# Altium PCB QUTMS-IMD-V00-PCB.PcbDoc
Units mil, origin at the board's own origin, x right, y up, seen from the top; angles counter-clockwise.
Board outline 6000 x 4000 mil, 2 copper layers (Top Layer, Bottom Layer); 65 components, 43 nets, 202 pads, 0 vias.
Unrouted connection lines stored in the file: 113.
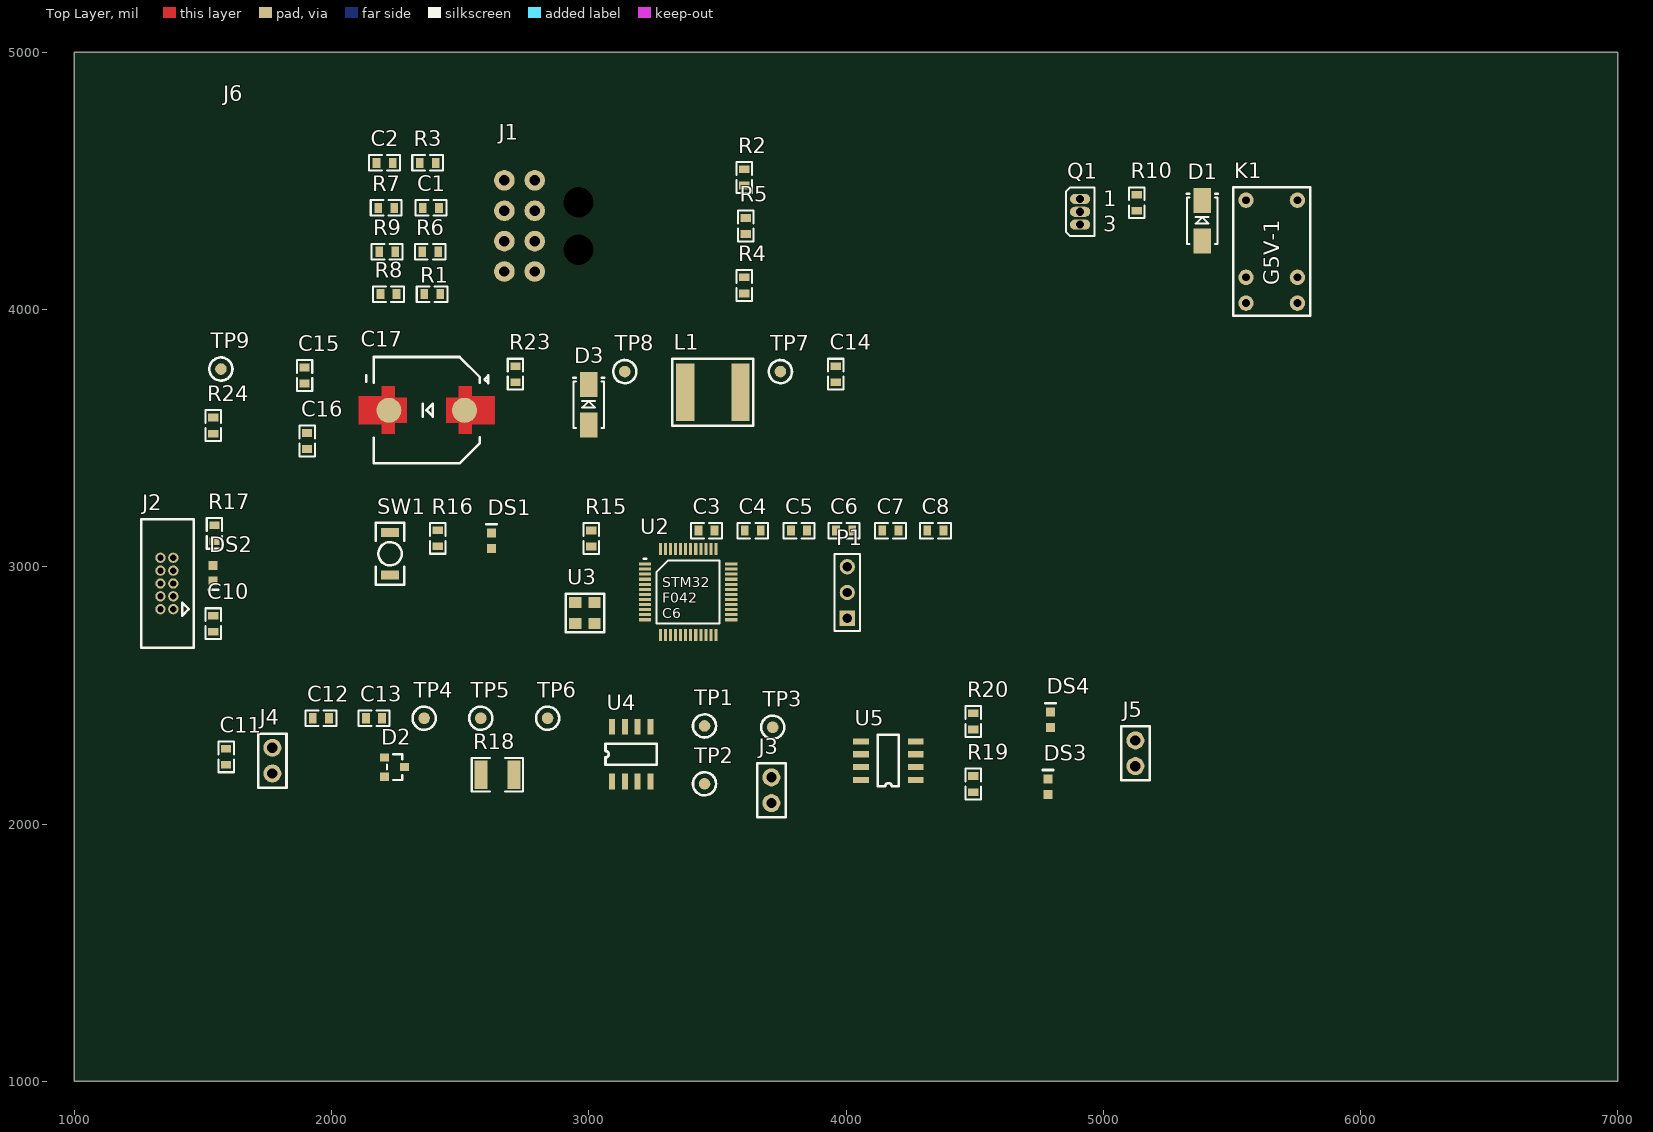
[diagram p0: Top Layer view]
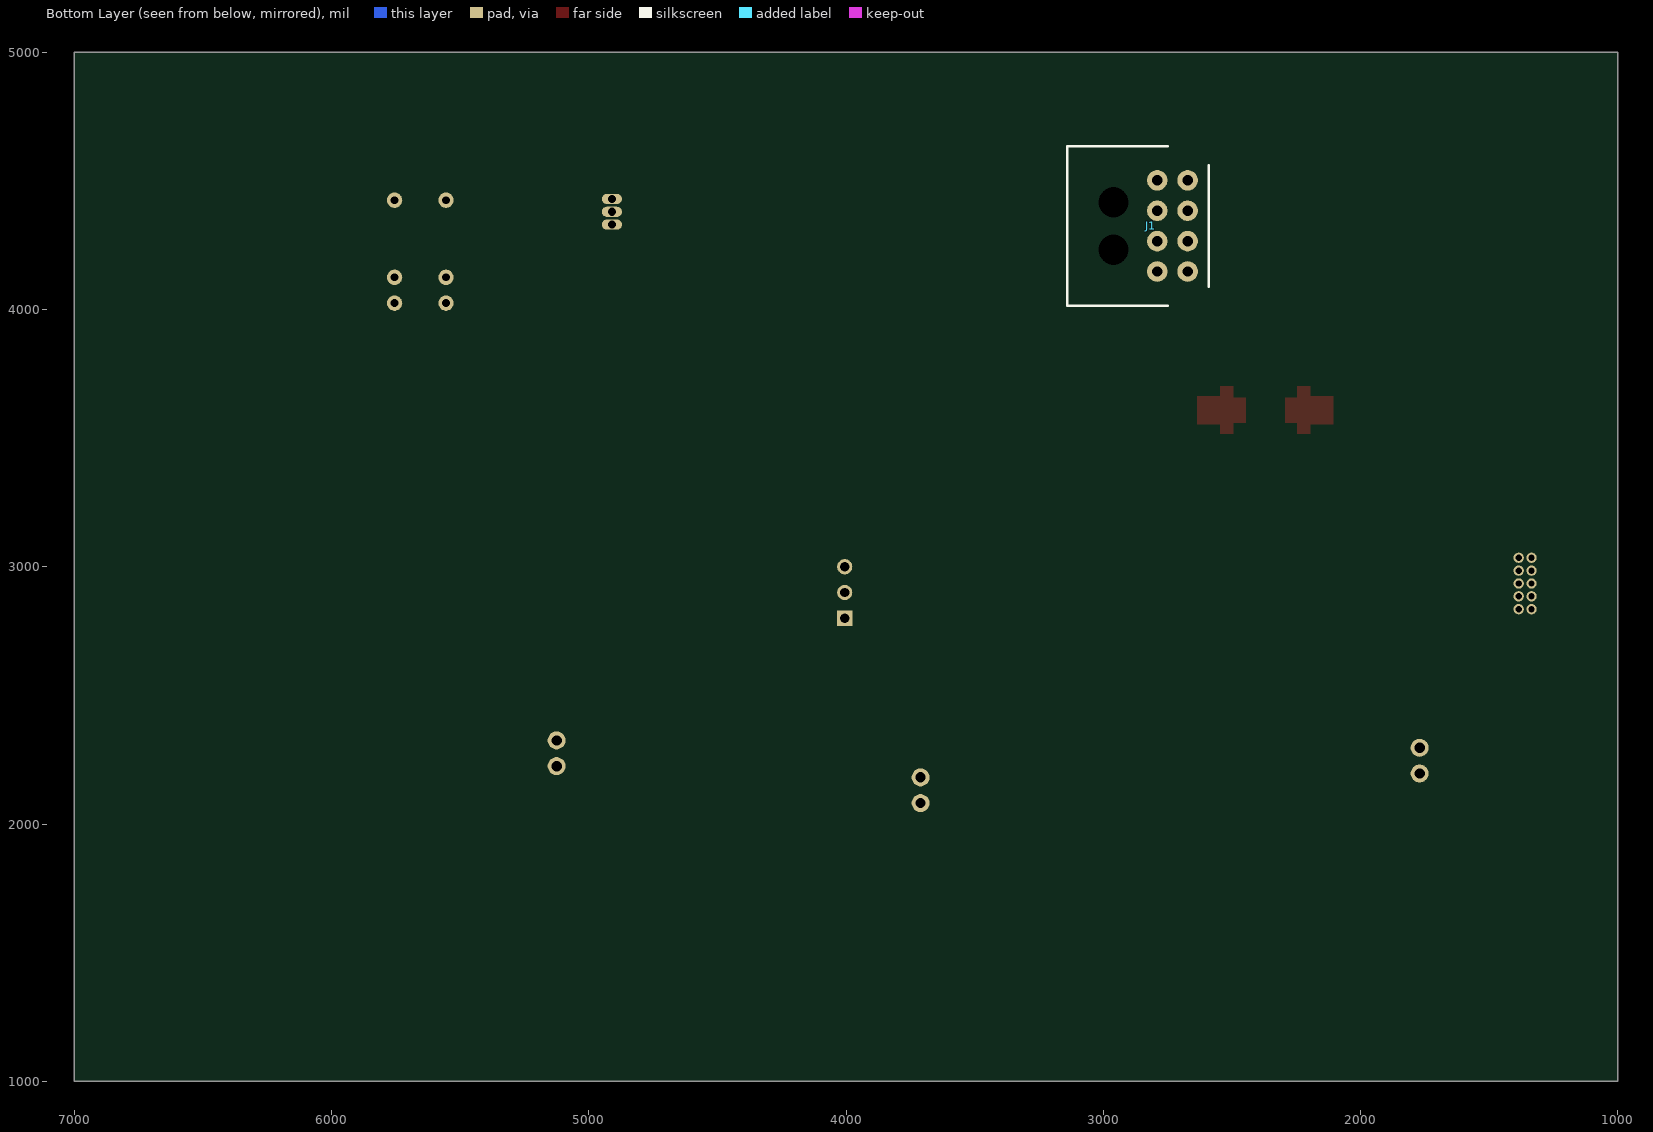
[diagram p1: Bottom Layer view, seen from below]

## Layer stack, top to bottom
Top Solder: solder mask 0.4, Solder Resist, Dk 3.5
Top Layer: signal copper 1.4
Dielectric 1: dielectric 12.6, FR-4, Dk 4.8
Bottom Layer: signal copper 1.4
Bottom Solder: solder mask 0.4, Solder Resist, Dk 3.5

## Board outline
1000,1000 7000,1000 7000,5000 1000,5000

## Design rules (kind name [scope] priority, off if disabled: settings)
Clearance [All] p1: gap=10 ignorepadtopadclearanceinfootprint=FALSE except(0: Arc-Hole Track-Hole SMDPad-Hole THPad-Hole Via-Hole Fill-Hole Poly-Hole Region-Hole Text-Hole)
PolygonConnect [All] p1: connectstyle=Relief reliefconductorwidth=10 reliefentries=4 polygonreliefangle="90 Angle" airgapwidth=10
RoomDefinition MICROCONTROLLER [InComponentClass('MICROCONTROLLER')] p1: confinementstyle=ConfineIn formatcopy=TRUE lockcomponents=FALSE outline 1222.52,2660.59 4862.52,2660.59 4862.52,3280.59 1222.52,3280.59
RoomDefinition "POWER SUPPLY" [InComponentClass('POWER SUPPLY')] p2: confinementstyle=ConfineIn formatcopy=TRUE lockcomponents=FALSE outline 1190,3368.74 4105,3368.74 4105,3918.74 1190,3918.74
RoomDefinition CANBUS [InComponentClass('CANBUS')] p3: confinementstyle=ConfineIn formatcopy=TRUE lockcomponents=FALSE outline 1490,2041.24 5310,2041.24 5310,2491.24 1490,2491.24
RoomDefinition SHUTDOWN [InComponentClass('SHUTDOWN')] p4: confinementstyle=ConfineIn formatcopy=TRUE lockcomponents=FALSE outline 4845,3965 5815,3965 5815,4585 4845,4585
RoomDefinition SHDN-IMD-S01-V00-IMDDaughter [InComponentClass('SHDN-IMD-S01-V00-IMDDaughter')] p5: confinementstyle=ConfineIn formatcopy=TRUE lockcomponents=FALSE outline 1905,4820 2040,4820 2040,4915 1905,4915
RoomDefinition IMD [InComponentClass('IMD')] p6: confinementstyle=ConfineIn formatcopy=TRUE lockcomponents=FALSE outline 1317.47,3990 4257.47,3990 4257.47,4660 1317.47,4660
RoutingVias [All] p1: holewidth=28 width=50 viastyle="Through Hole" minholewidth=28 minwidth=50 maxholewidth=28 maxwidth=50
SolderMaskExpansion [All] p1: expansion=4 istentingtop=FALSE
Width [All] p1: maxlimit=10 minlimit=10 preferedwidth=10
30 further rules are at their usual default settings.

## Classes and differential pairs
component class SHUTDOWN: D1 K1 Q1 R10
component class SHDN-IMD-S01-V00-IMDDaughter: J6
component class "POWER SUPPLY": C14 C15 C16 C17 D3 L1 R23 R24 TP7 TP8 TP9 U7
component class MICROCONTROLLER: C3 C4 C5 C6 C7 C8 C9 C10 DS1 DS2 J2 P1 R15 R16 R17 SW1 U2 U3
component class IMD: C1 C2 J1 R1 R2 R3 R4 R5 R6 R7 R8 R9
component class CANBUS: C11 C12 C13 D2 DS3 DS4 J3 J4 J5 R18 R19 R20 TP1 TP2 TP3 TP4 TP5 TP6 U4 U5

## Components (designator, comment, footprint, x,y, rotation, side; value= is the part's Value field where it differs from the comment)
C1 "100nF" Cap_Ceramic_0603 2386.24,4395 r0 top
C2 "100nF" Cap_Ceramic_0603 2206.24,4570 r0 top
C3 "100nF" Cap_Ceramic_0603 3457.52,3140.59 r0 top
C4 "4u7" Cap_Ceramic_0603 3637.52,3140.59 r0 top
C5 "100nF" Cap_Ceramic_0603 3817.52,3140.59 r0 top
C6 "4u7" Cap_Ceramic_0603 3992.52,3140.59 r0 top
C7 "100nF" Cap_Ceramic_0603 4172.52,3140.59 r0 top
C8 "4u7" Cap_Ceramic_0603 4347.52,3140.59 r0 top
C10 "100nF" Cap_Ceramic_0603 1540,2778.76 r90 top
C11 "100nF" Cap_Ceramic_0603 1590,2261.24 r90 top
C12 "100nF" Cap_Ceramic_0603 1958.76,2411.24 r0 top
C13 "100nF" Cap_Ceramic_0603 2165,2411.24 r180 top
C14 "100nF 100V 5% X7R 0603" Cap_Ceramic_0603 3960,3748.74 r90 top
C15 "47uF 16V 1210" Cap_Ceramic_0603 1895,3743.74 r90 top
C16 "47uF 16V 1210" Cap_Ceramic_0603 1905,3488.74 r90 top
C17 "47uF 80V 10% AluPoly 10x10mm" CAP_ALU_10x10mm 2370,3608.74 r0 top
D1 "1N4448WQ-7-F" SMA 5385,4345 r90 top
D2 "NUP2105L" NUP2105L 2245,2221.24 r270 top
D3 "B260A-13-F" SMA 3000,3630 r90 top
DS1 "LED Orange" "LED ORANGE 0603" 2622.52,3100.59 r90 top
DS2 "LED Orange" "LED ORANGE 0603" 1540,2975 r270 top
DS3 "LED Blue 0603" "LED BLUE 0603" 4785,2145 r90 top
DS4 "LED Blue 0603" "LED BLUE 0603" 4795,2405 r90 top
J1 "Microfit 3.0 2x4" Microfit_2X4_R_TH 2960,4325 r270 bottom
J2 "IDC 10P 2x5 1.27mm" "IDC 1.27MM 10P" 1360,2935 r90 top
J3 "Jumper 2Way Pins" Jumper_2Way_Pin 3710,2081.24 r270 top
J4 "Jumper 2Way Pins" Jumper_2Way_Pin 1770,2296.24 r90 top
J5 "Jumper 2Way Pins" Jumper_2Way_Pin 5125,2225 r270 top
J6 "Microfit 3.0 2x3" Microfit_2X3_R_SMD 1920,4805 r90 top
K1 "G5V-1-DC12" G5V-1 5655,4225 r90 top
L1 "74404064221" Inductor_6x6mm 3480,3678.74 r0 top
P1 "UART" HDR1X3 4005,2800 r90 top
Q1 "2N7002KT1G" E3 4910,4380 r0 top
R1 "2k2" Res_ThinFilm_0603 2391.24,4060 r0 top
R2 "2k2" Res_ThinFilm_0603 3605,4513.76 r90 top
R3 "2k2" Res_ThinFilm_0603 2373.76,4570 r0 top
R4 "10k" Res_ThinFilm_0603 3605,4093.76 r90 top
R5 "3k9" Res_ThinFilm_0603 3610,4325 r90 top
R6 "10k" Res_ThinFilm_0603 2383.76,4225 r0 top
R7 "3k9" Res_ThinFilm_0603 2212.47,4395 r0 top
R8 "10k" Res_ThinFilm_0603 2221.24,4060 r0 top
R9 "3k9" Res_ThinFilm_0603 2216.24,4225 r0 top
R10 "1K" Res_ThinFilm_0603 5130,4415 r90 top
R15 "4k7" Res_ThinFilm_0603 3010,3110 r90 top
R16 "330R" Res_ThinFilm_0603 2412.52,3110.59 r90 top
R17 "330R" Res_ThinFilm_0603 1545,3130 r90 top
R18 "120R 1% 1210" Res_ThinFilm_1210 2645,2191.24 r180 top
R19 "330R" Res_ThinFilm_0603 4495,2155 r90 top
R20 "330R" Res_ThinFilm_0603 4495,2398.76 r90 top
R23 "64k9 1%" Res_ThinFilm_0603 2715,3748.74 r90 top
R24 "19k6 1%" Res_ThinFilm_0603 1540,3548.74 r90 top
SW1 "B3U-1000P" "BTN B3U-1000P" 2227.52,3050.59 r90 top
TP1 "TestPoint_SMD" TestPointSMD 3450,2381.24 r0 top
TP2 "TestPoint_SMD" TestPointSMD 3450,2156.24 r0 top
TP3 "TestPoint_SMD" TestPointSMD 3715,2376.24 r0 top
TP4 "TestPoint_SMD" TestPointSMD 2360,2411.24 r0 top
TP5 "TestPoint_SMD" TestPointSMD 2580,2411.24 r0 top
TP6 "TestPoint_SMD" TestPointSMD 2840,2411.24 r0 top
TP7 "TestPoint_SMD" TestPointSMD 3745,3758.74 r0 top
TP8 "TestPoint_SMD" TestPointSMD 3140,3758.74 r0 top
TP9 "TestPoint_SMD" TestPointSMD 1570,3768.74 r0 top
U2 "STM32F042C6" STM32F042C6 3219.09,3010.59 r0 top
U3 "DSC1001DI1-008.0000T" DSC1001DI1-008.0000TCT-ND 2985,2820 r0 top
U4 "SN65HVD233" SN65HVD233DR 3165,2271.24 r90 top
U5 "Si8621BC-B-IS" Si8621BC-B-IS 4165,2246.24 r180 top

## Footprints (in the part's own frame and the unit in brackets; to place one, negate y for a bottom-side part, rotate by r counter-clockwise, add the part's x,y. Pads: shape width x height; smd on the part's side, far side on the other; paste and mask are expansions set on the pad)
"BTN B3U-1000P" [mil] "OMRON B3U-1000P"
  rect 35x70 smd: 1(-82.68,0) 2(82.68,0)
  silkscreen extent -120,-55 120,55, body extent -79,-49 79,49, height 63
CAP_ALU_10x10mm [mil]
  round 97.08 smd paste+0 mask+0: A(147.18,-0.5) K(-147.11,-0.5)
  Top Layer region: 76.8,-49.22 76.8,49.21 124.05,49.21 124.05,92.52 175.23,92.52 175.23,55 265,55 265,-55 175.23,-55 175.23,-92.52 124.05,-92.52 124.05,-49.22
  Top Layer region: -76.74,-49.22 -76.74,49.21 -123.98,49.21 -123.98,92.52 -175.16,92.52 -175.16,55 -265,55 -265,-55 -175.16,-55 -175.16,-92.52 -123.98,-92.52 -123.98,-49.22
  silkscreen extent -235,-207 240,207, body extent -260,-217 260,217, height 10
Cap_Ceramic_0603 [mil]
  rect 30x40 smd: 1(-31.24,0) 2(31.24,0)
  silkscreen extent -60,-30 60,30, body extent -31,-16 32,16, height 33
DSC1001DI1-008.0000TCT-ND [mil]
  rect 48x43 smd: 1(-37.4,41.34) 2(37.4,41.34) 3(37.4,-41.34) 4(-37.4,-41.34)
  silkscreen extent -75,-75 75,75, body extent -49,-63 49,63, height 33
E3 [mm] "TO, Flat Index; 3 In-Line, Axial Leads; Body Dia. 4.6mm; Lead Dia. 0.5 mm (max)"
  oval 2x1 hole 0.8: 1(0,1.27) 2(0,0) 3(0,-1.27)
  silkscreen extent -1.41,-2.41 1.41,2.41
G5V-1 [mil]
  round 60 hole 30: 1(-200,100) 2(-100,100) 5(200,100) 6(200,-100) 9(-100,-100) 10(-200,-100)
  silkscreen extent -250,-150 250,150, body extent -242,-148 250,148, height 394
HDR1X3 [mm] "Connector; Header; 3 Position"
  rect 1.5x1.5 hole 0.9: 1(0,0)
  round 1.5 hole 0.9: 2(2.54,0) 3(5.08,0)
  silkscreen extent -1.27,-1.27 6.35,1.27
"IDC 1.27MM 10P" [mil]
  round 40 hole 25: 1(-100,-25) 2(-100,25) 3(-50,-25) 4(-50,25) 5(0,-25) 6(0,25) 7(50,-25) 8(50,25) 9(100,-25) 10(100,25)
  silkscreen extent -250,-105 250,100, body extent -249,-104 249,100, height 214
Inductor_6x6mm [mm]
  rect 1.8x5.7 smd: 1(-2.667,0) 2(2.794,0)
  silkscreen extent -3.94,-3.3 4.06,3.3, body extent -3,-3 3,3, height 4.56
Jumper_2Way_Pin [mil]
  round 70 hole 40: 1(-100,0) 2(0,0)
  silkscreen extent -155,-55 55,55, body extent -142,-48 42,47, height 332
"LED BLUE 0603" [mil]
  rect 35x35 smd: 1(-30,0) 2(30,0)
  silkscreen extent 65,-20 65,20, body extent -40,-20 40,20, height 30
"LED ORANGE 0603" [mil]
  rect 35x35 smd: 1(-30,0) 2(30,0)
  silkscreen extent 65,-20 65,20, body extent -40,-20 40,20, height 30
Microfit_2X3_R_SMD [mil]
Microfit_2X4_R_TH [mil]
  round 80 hole 40: 1(177.17,170) 2(59.06,170) 3(-59.06,170) 4(-177.17,170) 5(177.17,288.19) 6(59.06,288.19) 7(-59.06,288.19) 8(-177.17,288.19)
  round 0 hole 118.11 mask+10: NC(-92.52,0) NC(92.52,0)
  silkscreen extent -310,-180 310,370, body extent -318,-180 318,302, height 350
NUP2105L [mm]
  rect 0.8x0.9 smd: 1(-0.95,-1) 2(0.95,-1) 3(0,1)
  silkscreen extent -1.27,-0.76 1.27,0.76, body extent -1.45,-1.22 1.45,1.18, height 1
Res_ThinFilm_0603 [mil]
  rect 30x40 smd: 1(-31.24,0) 2(31.24,0)
  silkscreen extent -60,-30 60,30, body extent -31,-16 32,16, height 18
Res_ThinFilm_1210 [mm]
  rect 1.3x2.8 smd: 1(-1.625,0) 2(1.625,0)
  silkscreen extent -2.54,-1.65 2.54,1.65, body extent -1.6,-1.25 1.6,1.25, height 0.6
Si8621BC-B-IS [mm]
  rect 1.55x0.6 smd: 1(-2.7,1.905) 2(-2.7,0.635) 3(-2.7,-0.635) 4(-2.7,-1.905) 5(2.7,-1.905) 6(2.7,-0.635) 7(2.7,0.635) 8(2.7,1.905)
  silkscreen extent -1.04,-2.54 1.04,2.54, body extent -3.01,-2.45 3.01,2.45, height 1.63
SMA [mm]
  rect 2.5x1.7 smd: A(-2,0) K(2,0)
  silkscreen extent -2.3,-1.52 2.67,1.52, body extent -2.52,-1.46 2.52,1.46, height 2.4
SN65HVD233DR [mm]
  rect 1.55x0.6 smd: 1(-2.7,1.903) 2(-2.7,0.633) 3(-2.7,-0.637) 4(-2.7,-1.907) 5(2.7,-1.907) 6(2.7,-0.637) 7(2.7,0.633) 8(2.7,1.903)
  silkscreen extent -1.04,-2.54 1.04,2.54, body extent -3.01,-2.45 3.01,2.45, height 1.63
STM32F042C6 [mm]
  rect 1.2x0.3 smd: 1(0,0) 2(0,-0.5) 3(0,-1) 4(0,-1.5) 5(0,-2) 6(0,-2.5) 7(0,-3) 8(0,-3.5) 9(0,-4) 10(0,-4.5) 11(0,-5) 12(0,-5.5) 25(8.5,-5.5) 26(8.5,-5) 27(8.5,-4.5) 28(8.5,-4) 29(8.5,-3.5) 30(8.5,-3) 31(8.5,-2.5) 32(8.5,-2) 33(8.5,-1.5) 34(8.5,-1) 35(8.5,-0.5) 36(8.5,0)
  rect 0.3x1.2 smd: 13(1.5,-7) 14(2,-7) 15(2.5,-7) 16(3,-7) 17(3.5,-7) 18(4,-7) 19(4.5,-7) 20(5,-7) 21(5.5,-7) 22(6,-7) 23(6.5,-7) 24(7,-7) 37(7,1.5) 38(6.5,1.5) 39(6,1.5) 40(5.5,1.5) 41(5,1.5) 42(4.5,1.5) 43(4,1.5) 44(3.5,1.5) 45(3,1.5) 46(2.5,1.5) 47(2,1.5) 48(1.5,1.5)
  silkscreen extent -0.13,-5.86 7.36,0.51, body extent -0.27,-7.26 8.76,1.77, height 1.5
TestPointSMD [mil]
  round 45 smd: 1(0,0)
  silkscreen extent -45,-45 45,45

## Part data
C1 C2 C3 C5 C7 C10 C11 C12 C13: library part "100nF 50V 5% X7R 0603", "Capacitor, Ceramic, SMD, 100nF, 50V, 5%, X7R, 0603"
C4 C6 C8: library part "4u7 50V 5% X7R 0603", "Capacitor, Ceramic, SMD, 4u7, 50V, 5%, X7R, 0603"
C14: "Capacitor, Ceramic, SMD, 100nF, 100V, 5%, X7R, 0603"
C15 C16: library part "47uF 16V 10% X7R 1210", "Capacitor, Ceramic, SMD, 47uF, 16V, 5%, X7R, 1210"
C17: "Capacitor, AluPoly, SMD, 47uF, 80V, 10%, AluPoly, 10x10mm"
D1: "Diode, SMD, 75V, 5%, 250mA, SOD123", Average Rectified Current=150mA, Forward Voltage=1V, Manufacturer="ON Semiconductor / Fairchild", Manufacturer Part Number=1N914BWS, Max Forward Surge Current (Ifsm)=4A, Max Operating Temperature=150°C, Max Repetitive Reverse Voltage (Vrrm)=75V, Max Reverse Leakage Current=5uA, Min Operating Temperature=-55°C, Package Quantity=1, Power Dissipation=200mW, Category="Rectifier Diodes", Contact Plating=Tin,Matte, Element Configuration=Single, Forward Current=150mA, Height=1mm, Lead Free="Lead Free", Length=1.8mm, Max Reverse Voltage (DC)=75V, Mount="Surface Mount", Number of Pins=2, Packaging="Tape and Reel", Peak Reverse Current=5uA, Radiation Hardening=No, REACH SVHC="No SVHC", Recovery Time=4ns, Reverse Recovery Time=4ns, Reverse Voltage=75V, Weight=0.0276g, Width=1.35mm
D3: "Diode, Schottky Barrier Rectifier, 60 V, 2 A, B260A-13-F"
DS1 DS2: library part "LED ORANGE 0603"
DS3 DS4: library part "LED BLUE 0603"
J1: library part Microfit_2x4
J3 J4 J5: library part "Jumper 2Way Side Pins", "Jumper 2Way Side Pins"
J6: library part Microfit_2x3
K1: "General Purpose Relay SPDT (1 Form C) Through Hole, 12V, 2A"
L1: "FIXED IND 220UH 660MA 850 MOHM", ComponentLink1Description=Digikey, ComponentLink1URL=https://www.digikey.com.au/product-detail/en/w%C3%BCrth-elektronik/74404064221/732-7261-1-ND/5353241, ComponentLink2Description="LCSC A", ComponentLink2URL=https://lcsc.com/product-detail/Power-Inductors_Sunlord-SWPA6045S221MT_C91047.html, ComponentLink3Description="LCSC B", ComponentLink3URL=https://lcsc.com/product-detail/Power-Inductors_SXN-Shun-Xiang-Nuo-Elec-SMNR6045-221MT_C467145.html
P1: library part "Header 3", "Header, 3-Pin", LatestRevisionDate=17-Jul-2002, LatestRevisionNote="Re-released for DXP Platform.", Publisher="Altium Limited"
Q1: library part MOSFET-N, "N-Channel MOSFET", LatestRevisionDate=17-Jul-2002, LatestRevisionNote="Re-released for DXP Platform.", PackageDescription="TO, Flat Index; 3 In-Line, Axial Leads; Body Dia. 4.6mm; Lead Dia. 0.5 mm (max)", PackageReference=E3, PackageVersion=1995/1996, Published=8-Jun-2000, Publisher="Altium Limited"
R1 R2 R3: library part "2k2 5% 0603", "Resistor, SMD, 2k2, 0.1W, 5%, 0603"
R4 R6 R8: library part "10k 1% 0603", "Resistor, SMD, 10k, 0.1W, 1%, 0603"
R5 R7 R9: library part "3k9 5% 0603", "Resistor, SMD, 3k9, 0.1W, 5%, 0603"
R10: library part "1k 5% 0603", "Resistor, SMD, 1k, 0.1W, 5%, 0603"
R15: library part "4k7 5% 0603", "Resistor, SMD, 4k7, 0.1W, 5%, 0603"
R16 R17 R19 R20: library part "330R 5% 0603", "Resistor, SMD, 330R, 0.1W, 5%, 0603"
R18: "Resistor, SMD, 120R, 0.25W, 1%, 1210"
R23: library part "64k9 1% 0603", "Resistor, SMD, 64k9, 0.1W, 5%, 0603"
R24: library part "19k6 1% 0603", "Resistor, SMD, 19k6, 0.1W, 5%, 0603"
SW1: library part "BTN B3U-1000P", "Omron B3U-1000P Ultra Miniture Switch", ComponentLink1Description=LCSC, ComponentLink1URL=https://lcsc.com/product-detail/Tactile-Switches_BRIGHT-TSA063G50-250_C294565.html
U2: library part STM32042C6, "ARM® Cortex®-M0 STM32F0 Microcontroller IC 32-Bit 48MHz 32KB (32K x 8) FLASH 48-LQFP (7x7)", ComponentLink1Description=Digikey, ComponentLink1URL=https://www.digikey.com.au/product-detail/en/stmicroelectronics/STM32F042C6T6TR/497-19319-1-ND/10063344, ComponentLink2Description=Datasheet, ComponentLink2URL=https://www.st.com/resource/en/datasheet/stm32f042k6.pdf
U3: "on 8MHz XO (Standard) CMOS Oscillator 1.8 ~ 3.3V Standby (Power Down) 4-SMD, No Lead"
D2: ComponentLink1Description=Datasheet, ComponentLink1URL=https://www.onsemi.cn/PowerSolutions/document/NUP2105L-D.PDF, ComponentLink2Description=LCSC, ComponentLink2URL=https://lcsc.com/product-detail/TVS_ON-Semiconductor-NUP2105LT1G_C14486.html, ComponentLink3Description=Digikey, ComponentLink3URL=https://www.digikey.com.au/product-detail/en/on-semiconductor/SZNUP2105LT1G/SZNUP2105LT1GOSCT-ND/3487669
U4: ComponentLink1Description=LCSC, ComponentLink1URL=https://lcsc.com/product-detail/CAN-ICs_Texas-Instruments_SN65HVD233DRG4_Texas-Instruments-Texas-Instruments-SN65HVD233DRG4_C61643.html, ComponentLink2Description=Digikey, ComponentLink2URL=https://www.digikey.com.au/product-detail/en/texas-instruments/SN65HVD233DR/296-35967-1-ND/4134960, ComponentLink3Description=Datasheet, ComponentLink3URL=https://www.ti.com/lit/ds/symlink/sn65hvd233.pdf?ts=1588560888178, ComponentLink4Description="Ti Product Page", ComponentLink4URL=https://www.ti.com/product/SN65HVD233
U5: ComponentLink1Description=Digikey, ComponentLink1URL=https://www.digikey.com.au/product-detail/en/silicon-labs/SI8621BC-B-ISR/336-4774-1-ND/8611005, ComponentLink2Description=Datasheet, ComponentLink2URL=https://www.silabs.com/documents/public/data-sheets/si861x-2x-datasheet.pdf

## Nets (pads, with @x,y where several pads share a name; then routed paths per layer and width w, separated by ;. In a path a pad name is that pad's centre, name@x,y a point inside that pad or via, vN(x,y) a via of type N, cw(c..) or ccw(c..) an arc to the next point about the centre after c; other vN are vias at no path point)
3V3: C1.2 C2.2 C3.1 C4.1 C5.1 C6.1 C7.1 C8.1 C13.1 C15.1 C16.1 J2.1 J5.1 L1.2 R15.2 R16.2 R17.2 R23.2 TP7.1 U2.1 U2.9 U2.24 U2.36 U2.48 U3.1 U3.4 U5.1
36V: C17.A
+12: D1.K J1.2 K1.1 R2.2
"CAN H": D2.2 J3.1 TP1.1 U4.7
"CAN L": D2.1 R18.1 TP4.1 U4.6
"CAN LBK": J4.2 U4.5
"CAN LED": DS3.1 DS4.1 J5.2
"CAN RX": R20.1 TP6.1 U2.32 U5.3
"CAN RX LED": DS4.2 R20.2
"CAN TX": R19.1 TP3.1 U2.33 U5.2
"CAN TX LED": DS3.2 R19.2
GND: C1.1 C2.1 C17.K J1.1 J1.3 J1.4 J2.3 J2.5 J2.9 P1.3 Q1.3 R1.1 R3.1 R5.1 R7.1 R9.1 R24.1 SW1.1 U2.6 U2.8 U2.23 U2.35 U2.47 U3.2 U5.4
"IMD M": J1.5 R3.2 R4.2
"IMD MEAS": U2.10
"IMD ML": J1.6 R2.1 R6.2
"IMD MLV": R6.1 R7.2
"IMD MV": R4.1 R5.2
"IMD S": J1.8 R1.2 R8.2
"IMD STAT": R10.1 U2.11 U2.19
"IMD SV": R8.1 R9.2
"ISO 3V3": C11.1 C12.1 J4.1 U4.3 U5.8
"ISO CAN RX": TP5.1 U4.4 U5.6
"ISO CAN TX": TP2.1 U4.1 U5.7
"ISO GND": D2.3 U4.2 U4.8 U5.5
LED0: DS1.2 U2.27
LED1: DS2.2 U2.28
NetD1_A: D1.A K1.2 Q1.1
NetDS1_1: DS1.1 R16.1
NetDS2_1: DS2.1 R17.1
NetJ3_2: J3.2 R18.2
NetQ1_2: Q1.2 R10.2
NetU1_13: 
NRST: C10.1 J2.10 R15.1 SW1.2 U2.7
"OSC IN": U2.5 U3.3
"PWR CB": 
"PWR FB": R23.1 R24.2 TP9.1
"PWR SW": C14.1 L1.1 TP8.1
"SHDN IN": 
"SHDN OUT": 
SWCLK: J2.4 U2.37
SWDIO: J2.2 U2.34
"USART1 RX": P1.2 U2.31
"USART1 TX": P1.1 U2.30
pads on no net: C3.2 C4.2 C5.2 C6.2 C7.2 C8.2 C10.2 C11.2 C12.2 C13.2 C14.2 C15.2 C16.2 D3.A D3.K J1.7 J1.NC J2.6 J2.7 J2.8 K1.5 K1.6 K1.9 K1.10 U2.2 U2.3 U2.4 U2.12 U2.13 U2.14 U2.15 U2.16 U2.17 U2.18 U2.20 U2.21 U2.22 U2.25 U2.26 U2.29 U2.38 U2.39 U2.40 U2.41 U2.42 U2.43 U2.44 U2.45 U2.46

## Text inside footprints (layer, text, board x,y; h text height)
K1: Top Overlay "G5V-1" at 5685,4095.04 h60 r90
Q1: Top Overlay "1" at 4999.57,4401.85 h59.05; Top Overlay "3" at 4999.57,4302.72 h59.05
U2: Top Overlay "STM32 / F042 / C6" at 3286.57,2799.82 h40